# Altium PCB FC_MainBoard.PcbDoc (part 2 of 2)
Units mil, origin at the board's own origin, x right, y up, seen from the top; angles counter-clockwise.
Board outline 7630 x 3525 mil, 4 copper layers (Top Layer, Mid-Layer 1, Mid-Layer 2, Bottom Layer); 75 components, 79 nets, 708 pads, 334 vias.
Unrouted connection lines stored in the file: 1.
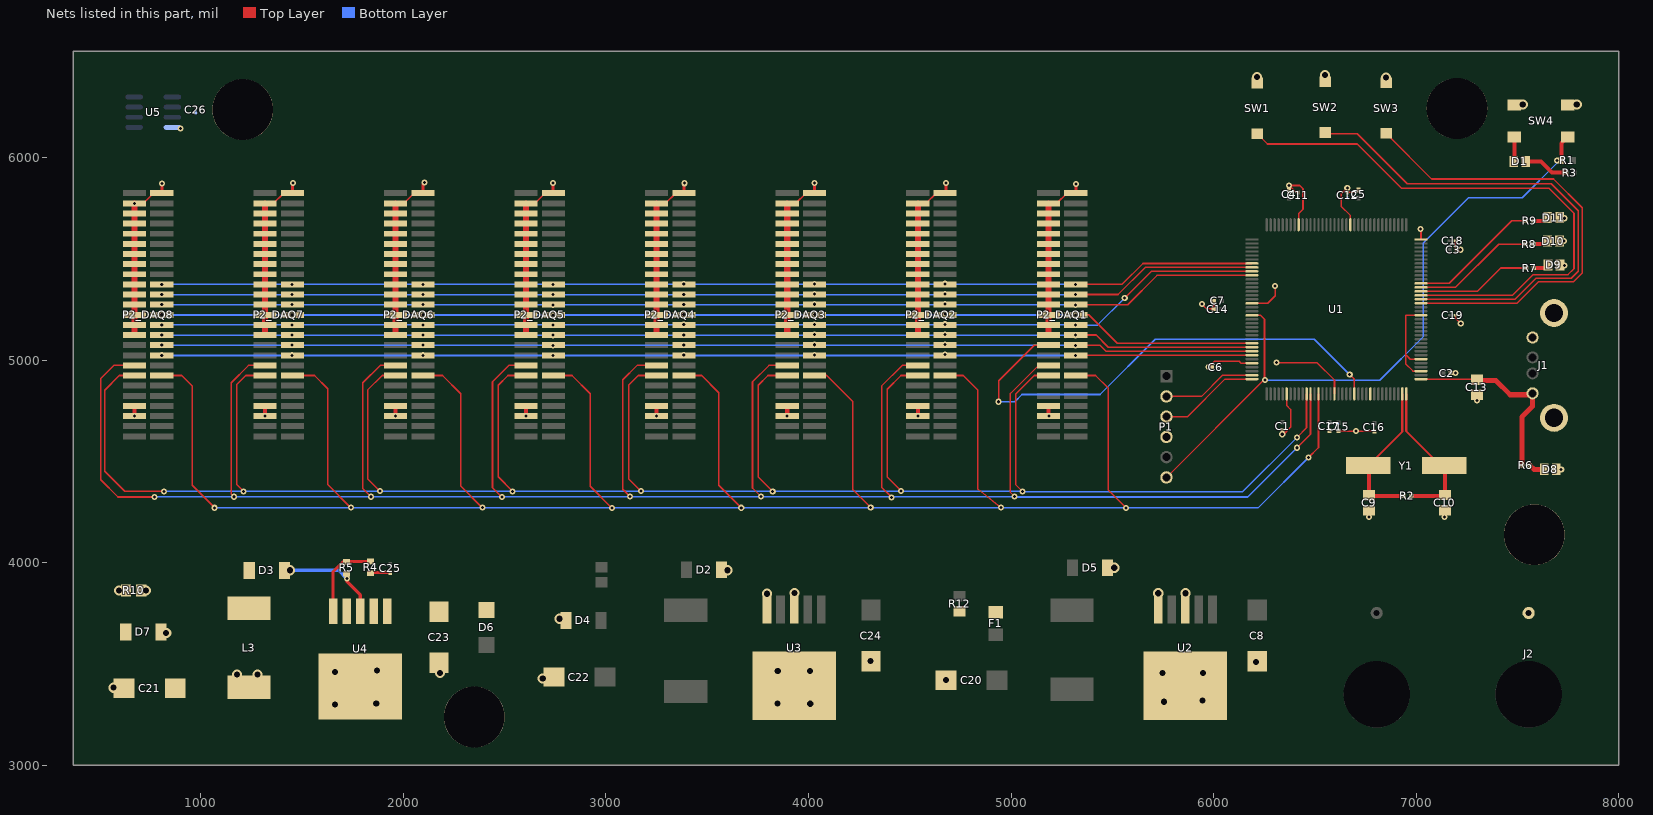
[diagram p4: the nets of this part, all layers, seen from the top]

## Via types
v1: diameter 30, hole 15, Top Layer to Bottom Layer, 289 vias
v2: diameter 50, hole 30, Top Layer to Bottom Layer, 45 vias

## Nets (pads, with @x,y where several pads share a name; then routed paths per layer and width w, separated by ;. In a path a pad name is that pad's centre, name@x,y a point inside that pad or via, vN(x,y) a via of type N, cw(c..) or ccw(c..) an arc to the next point about the centre after c; other vN are vias at no path point) (continued)
DATA8: P2_DAQ1.31 P2_DAQ2.31 P2_DAQ3.31 P2_DAQ4.31 P2_DAQ5.31 P2_DAQ6.31 P2_DAQ7.31 P2_DAQ8.31 U1.7 | length 5421.8
  Top Layer w8: P2_DAQ1.31@5319,5374 5548,5374 5651.38,5477.38 U1.7@6188.99,5477.38
  Bottom Layer w8: v1(807,5374) v1(1451,5374) v1(2097,5374) v1@5316,5374
  other v1: 2739,5373 5317,5373 3384,5375 4029,5376 4673,5377
DATA9: P2_DAQ1.29 P2_DAQ2.29 P2_DAQ3.29 P2_DAQ4.29 P2_DAQ5.29 P2_DAQ6.29 P2_DAQ7.29 P2_DAQ8.29 U1.8 | length 5435.8
  Top Layer w8: P2_DAQ1.29@5319,5324 5528,5324 5661.69,5457.69 U1.8@6188.99,5457.69
  Bottom Layer w8: v1(807,5324) 808,5323 v1(2739,5323) v1(5317,5323)
  other v1: 1451,5324 2097,5324 3384,5325 4029,5326 4673,5327
DATA10: P2_DAQ1.27 P2_DAQ2.27 P2_DAQ3.27 P2_DAQ4.27 P2_DAQ5.27 P2_DAQ6.27 P2_DAQ7.27 P2_DAQ8.27 U1.10 | length 5438.8
  Top Layer w8: P2_DAQ1.27@5319,5274 5576,5274 5720.32,5418.32 U1.10@6188.99,5418.32
  Bottom Layer w8: v1(807,5274) v1(1451,5274) v1(2097,5274) v1@5316,5274
  other v1: 2739,5273 5317,5273 3384,5275 4029,5276 4673,5277
DATA11: P2_DAQ1.25 P2_DAQ2.25 P2_DAQ3.25 P2_DAQ4.25 P2_DAQ5.25 P2_DAQ6.25 P2_DAQ7.25 P2_DAQ8.25 U1.27 | length 5437.1
  Top Layer w8: P2_DAQ1.25@5319,5224 5384,5224 5524.32,5083.68 U1.27@6188.99,5083.68
  Bottom Layer w8: v1@808,5223 v1(2739,5223) v1(5317,5223)
  other v1: 807,5224 1451,5224 2097,5224 3384,5225 4029,5226 4673,5227
DATA12: P2_DAQ1.23 P2_DAQ2.23 P2_DAQ3.23 P2_DAQ4.23 P2_DAQ5.23 P2_DAQ6.23 P2_DAQ7.23 P2_DAQ8.23 U1.9 | length 5490.8
  Top Layer w8: v1(5561,5307) 5692.01,5438.01 U1.9@6188.99,5438.01
  Bottom Layer w8: v1(807,5174) v1(1451,5174) v1(2097,5174) v1@5316,5174 ; v1(5317,5173) 5427,5173 v1(5561,5307)
  other v1: 2739,5173 3384,5175 4029,5176 4673,5177
DATA13: P2_DAQ1.21 P2_DAQ2.21 P2_DAQ3.21 P2_DAQ4.21 P2_DAQ5.21 P2_DAQ6.21 P2_DAQ7.21 P2_DAQ8.21 U1.28 | length 5403.8
  Top Layer w8: P2_DAQ1.21@5319,5124 5420,5124 5480.01,5063.99 U1.28@6188.99,5063.99
  Bottom Layer w8: v1@808,5123 v1(2739,5123) v1(5317,5123)
  other v1: 807,5124 1451,5124 2097,5124 3384,5125 4029,5126 4673,5127
DATA14: P2_DAQ1.19 P2_DAQ2.19 P2_DAQ3.19 P2_DAQ4.19 P2_DAQ5.19 P2_DAQ6.19 P2_DAQ7.19 P2_DAQ8.19 U1.29 | length 5391.3
  Top Layer w8: P2_DAQ1.19@5319,5074 5439,5074 5468.69,5044.31 U1.29@6188.99,5044.31
  Bottom Layer w8: v1(807,5074) v1(1451,5074) v1(2097,5074) v1@5316,5074
  other v1: 2739,5073 5317,5073 3384,5075 4029,5076 4673,5077
DATA15: P2_DAQ1.17 P2_DAQ2.17 P2_DAQ3.17 P2_DAQ4.17 P2_DAQ5.17 P2_DAQ6.17 P2_DAQ7.17 P2_DAQ8.17 U1.30 | length 5380.7
  Top Layer w8: P2_DAQ1.17@5319,5024 5319.62,5024.62 U1.30@6188.99,5024.62
  Bottom Layer w8: v1(807,5024) 808,5023 v1(2739,5023) v1(5317,5023)
  other v1: 1451,5024 2097,5024 3384,5025 4029,5026 4673,5027
FRSTDATA_DAQ1: P2_DAQ1.14 P2_DAQ2.14 P2_DAQ3.14 P2_DAQ4.14 P2_DAQ5.14 P2_DAQ6.14 P2_DAQ7.14 P2_DAQ8.14 U1.47 | length 11775
  Top Layer w8: P2_DAQ8.14@672,4924 597.48,4924 525.17,4851.69 525.17,4452.16 624.88,4352.44 v1(818.66,4352.44) ; v1(1211.32,4351.99) 1177.99,4385.32 1177.99,4880.27 1221.72,4924 P2_DAQ7.14@1316.57,4924 ; v1(1884.4,4353.18) 1823.19,4414.39 1823.19,4852.33 1894.86,4924 P2_DAQ6.14@1961.14,4924 ; v1(2538.96,4352.39) 2467.57,4423.77 2467.57,4875.65 2515.92,4924 P2_DAQ5.14@2605.71,4924 ; v1(3172.22,4353.97) 3112.84,4413.35 3112.84,4877.52 3159.32,4924 P2_DAQ4.14@3250.29,4924 ; v1(3823.22,4351.99) 3752.51,4422.71 3752.51,4876.59 3799.92,4924 P2_DAQ3.14@3894.86,4924 ; v1(4457.52,4353.57) 4388.47,4422.62 4388.47,4856.14 4456.33,4924 P2_DAQ2.14@4539.43,4924 ; v1(5056.69,4351.42) 5022.25,4385.86 5022.25,4832.08 5114.17,4924 P2_DAQ1.14@5184,4924 ; v1(6410.99,4617.99) 6458.68,4665.68 U1.47@6458.68,4833.68
  Bottom Layer w8: v1(818.66,4352.44) 5055.66,4352.44 v1(5056.69,4351.42) ; v1@5059.68,4349.92 6142.92,4349.92 v1(6410.99,4617.99)
GND: C1.1 C2.1 C3.1 C4.1 C5.1 C6.1 C7.1 C8.2 C9.1 C10.1 C11.2 C12.2 C13.1 C14.1 C15.1 C16.1 C17.1 C18.2 C19.2 C20.2 C21.1 C22.2 C24.2 C26.2 D2.1 D4.1 D5.1 D7.2 D8.2 D9.2 D10.2 D11.2 J1.4 J1.5 J1.6 J2.1 L3.2 P1.4 P2_DAQ1.22 P2_DAQ1.24 P2_DAQ1.26 P2_DAQ1.28 P2_DAQ1.30 P2_DAQ1.32 P2_DAQ1.34 P2_DAQ1.36 P2_DAQ1.38 P2_DAQ1.40 P2_DAQ1.42 P2_DAQ1.44 P2_DAQ1.46 P2_DAQ1.48 P2_DAQ1.49 P2_DAQ2.22 P2_DAQ2.24 P2_DAQ2.26 P2_DAQ2.28 P2_DAQ2.30 P2_DAQ2.32 P2_DAQ2.34 P2_DAQ2.36 P2_DAQ2.38 P2_DAQ2.40 P2_DAQ2.42 P2_DAQ2.44 P2_DAQ2.46 P2_DAQ2.48 P2_DAQ2.49 P2_DAQ3.22 P2_DAQ3.24 P2_DAQ3.26 P2_DAQ3.28 P2_DAQ3.30 P2_DAQ3.32 P2_DAQ3.34 P2_DAQ3.36 P2_DAQ3.38 P2_DAQ3.40 P2_DAQ3.42 P2_DAQ3.44 P2_DAQ3.46 P2_DAQ3.48 P2_DAQ3.49 P2_DAQ4.22 P2_DAQ4.24 P2_DAQ4.26 P2_DAQ4.28 P2_DAQ4.30 P2_DAQ4.32 P2_DAQ4.34 P2_DAQ4.36 P2_DAQ4.38 P2_DAQ4.40 P2_DAQ4.42 P2_DAQ4.44 P2_DAQ4.46 P2_DAQ4.48 P2_DAQ4.49 P2_DAQ5.22 P2_DAQ5.24 P2_DAQ5.26 P2_DAQ5.28 P2_DAQ5.30 P2_DAQ5.32 P2_DAQ5.34 P2_DAQ5.36 P2_DAQ5.38 P2_DAQ5.40 P2_DAQ5.42 P2_DAQ5.44 P2_DAQ5.46 P2_DAQ5.48 P2_DAQ5.49 P2_DAQ6.22 P2_DAQ6.24 P2_DAQ6.26 P2_DAQ6.28 P2_DAQ6.30 P2_DAQ6.32 P2_DAQ6.34 P2_DAQ6.36 P2_DAQ6.38 P2_DAQ6.40 P2_DAQ6.42 P2_DAQ6.44 P2_DAQ6.46 P2_DAQ6.48 P2_DAQ6.49 P2_DAQ7.22 P2_DAQ7.24 P2_DAQ7.26 P2_DAQ7.28 P2_DAQ7.30 P2_DAQ7.32 P2_DAQ7.34 P2_DAQ7.36 P2_DAQ7.38 P2_DAQ7.40 P2_DAQ7.42 P2_DAQ7.44 P2_DAQ7.46 P2_DAQ7.48 P2_DAQ7.49 P2_DAQ8.22 P2_DAQ8.24 P2_DAQ8.26 P2_DAQ8.28 P2_DAQ8.30 P2_DAQ8.32 P2_DAQ8.34 P2_DAQ8.36 P2_DAQ8.38 P2_DAQ8.40 P2_DAQ8.42 P2_DAQ8.44 P2_DAQ8.46 P2_DAQ8.48 P2_DAQ8.49 pad.0 SW1.2 SW2.2 SW3.2 SW4.1 SW4.2 U1.17 U1.32 U1.42 U1.54 U1.63 U1.75 U1.78 U1.89 U1.108 U1.123 U1.136 U2.3 U2.5 U2.6 U3.3 U3.5 U3.6 U4.6 U5.4 | length 9128.4
  Top Layer w8: P2_DAQ8.48@716.47,5774 766.47,5824 P2_DAQ8.49@807,5824 ; P2_DAQ7.48@1316.57,5774 1358.94,5774 P2_DAQ7.49@1408.94,5824 ; P2_DAQ6.48@1961.14,5774 2002.47,5774 P2_DAQ6.49@2052.47,5824 ; P2_DAQ5.48@2605.71,5774 2649.24,5774 P2_DAQ5.49@2700.7,5825.46 ; P2_DAQ4.48@3250.29,5774 3294.22,5774 3344.22,5824 P2_DAQ4.49@3385.29,5824 ; P2_DAQ3.48@3894.86,5774 3937.03,5774 P2_DAQ3.49@3987.03,5824 ; P2_DAQ2.48@4539.43,5774 4579.85,5774 P2_DAQ2.49@4629.85,5824 ; P2_DAQ1.48@5184,5774 5225.88,5774 5275.88,5824 P2_DAQ1.49@5319,5824 ; v1(5941.72,5276.39) 5965.1,5253 5999.63,5253 C7.1@5999.63,5292 ; v1(5975.63,4965.65) 6004.02,4994.05 6126.49,4994.05 6135.29,4985.25 U1.32@6188.99,4985.25 ; U1.17@6188.99,5280.53 6267,5280.53 6303.91,5317.44 v1(6303.91,5366.17) ; v1(6309.87,4987.36) 6510.66,4987.36 6596.47,4901.55 U1.54@6596.47,4833.68 ; v1(6338.68,4634.07) 6345.49,4634.07 6379.79,4668.36 6379.79,4756.79 6360.25,4776.32 U1.42@6360.25,4833.68 ; C11.2@6417.14,5827.78 6407.19,5827.78 v1(6372.67,5862.3) 6424.99,5862.3 6440.99,5846.3 6440.99,5744.97 6419.31,5723.29 U1.136@6419.31,5668.32 ; C15.1@6619,4649.32 C16.1@6794,4649.32 ; v1(6659.75,5850.12) 6630.4,5820.76 6630.4,5758.86 6675.21,5714.05 U1.123@6675.21,5668.32 ; C12.2@6661.31,5828.78 6704.41,5828.78 C5.1@6715.31,5839.69 ; U1.89@7023.5,5221.34 6947.55,5221.34 6947.55,5028.43 ; U1.75@7023.64,4945.88 6983.8,4945.88 6947.55,4982.12 6947.55,5028.43 ; U1.78@7023.64,5004.94 6971.04,5004.94 6947.55,5028.43 ; U1.108@7023.64,5595.49 v1@7023.64,5646.05 ; C18.2@7193.09,5590 7193.09,5554.91 C3.1@7202,5546 ; C19.2@7195.09,5221 7195.09,5205.78 v1(7219.97,5180.9)
  Top Layer w15: P2_DAQ8.49@807,5824 807.71,5824.71 v1(807.71,5872.66) ; P2_DAQ7.49@1451.57,5824 v1@1451.57,5872.01 ; P2_DAQ6.49@2096.14,5824 2096.14,5867.72 v1(2104.65,5876.22) ; P2_DAQ5.49@2739.25,5825.46 v1(2739.25,5873.85) ; P2_DAQ4.49@3385.29,5824 3385.29,5871.01 v1(3387.72,5873.45) ; v1(4029.06,5874.64) 4029.86,5873.84 P2_DAQ3.49@4029.86,5824 ; P2_DAQ2.49@4674.43,5824 4679.11,5828.68 v1(4679.11,5874.24) ; P2_DAQ1.49@5319,5824 5320.05,5825.05 v1(5320.05,5868.7)
  Top Layer w30: P2_DAQ8.22@672,5124 P2_DAQ8.24@672,5174 P2_DAQ8.26@672,5224 P2_DAQ8.28@672,5274 P2_DAQ8.30@672,5324 P2_DAQ8.32@672,5374 P2_DAQ8.34@672,5424 P2_DAQ8.36@672,5474 P2_DAQ8.38@672,5524 P2_DAQ8.40@672,5574 P2_DAQ8.42@672,5624 P2_DAQ8.44@672,5674 P2_DAQ8.46@672,5724 v1(672,5774) ; P2_DAQ7.22@1316.57,5124 P2_DAQ7.24@1316.57,5174 P2_DAQ7.26@1316.57,5224 P2_DAQ7.28@1316.57,5274 P2_DAQ7.30@1316.57,5324 P2_DAQ7.32@1316.57,5374 P2_DAQ7.34@1316.57,5424 P2_DAQ7.36@1316.57,5474 P2_DAQ7.38@1316.57,5524 P2_DAQ7.40@1316.57,5574 P2_DAQ7.42@1316.57,5624 P2_DAQ7.44@1316.57,5674 P2_DAQ7.46@1316.57,5724 P2_DAQ7.48@1316.57,5774 ; P2_DAQ6.22@1961.14,5124 P2_DAQ6.24@1961.14,5174 P2_DAQ6.26@1961.14,5224 P2_DAQ6.28@1961.14,5274 P2_DAQ6.30@1961.14,5324 P2_DAQ6.32@1961.14,5374 P2_DAQ6.34@1961.14,5424 P2_DAQ6.36@1961.14,5474 P2_DAQ6.38@1961.14,5524 P2_DAQ6.40@1961.14,5574 P2_DAQ6.42@1961.14,5624 P2_DAQ6.44@1961.14,5674 P2_DAQ6.46@1961.14,5724 P2_DAQ6.48@1961.14,5774 ; P2_DAQ5.22@2605.71,5124 P2_DAQ5.24@2605.71,5174 P2_DAQ5.26@2605.71,5224 P2_DAQ5.28@2605.71,5274 P2_DAQ5.30@2605.71,5324 P2_DAQ5.32@2605.71,5374 P2_DAQ5.34@2605.71,5424 P2_DAQ5.36@2605.71,5474 P2_DAQ5.38@2605.71,5524 P2_DAQ5.40@2605.71,5574 P2_DAQ5.42@2605.71,5624 P2_DAQ5.44@2605.71,5674 P2_DAQ5.46@2605.71,5724 P2_DAQ5.48@2605.71,5774 ; P2_DAQ4.22@3250.29,5124 P2_DAQ4.24@3250.29,5174 P2_DAQ4.26@3250.29,5224 P2_DAQ4.28@3250.29,5274 P2_DAQ4.30@3250.29,5324 P2_DAQ4.32@3250.29,5374 P2_DAQ4.34@3250.29,5424 P2_DAQ4.36@3250.29,5474 P2_DAQ4.38@3250.29,5524 P2_DAQ4.40@3250.29,5574 P2_DAQ4.42@3250.29,5624 P2_DAQ4.44@3250.29,5674 P2_DAQ4.46@3250.29,5724 P2_DAQ4.48@3250.29,5774 ; P2_DAQ3.22@3894.86,5124 P2_DAQ3.24@3894.86,5174 P2_DAQ3.26@3894.86,5224 P2_DAQ3.28@3894.86,5274 P2_DAQ3.30@3894.86,5324 P2_DAQ3.32@3894.86,5374 P2_DAQ3.34@3894.86,5424 P2_DAQ3.36@3894.86,5474 P2_DAQ3.38@3894.86,5524 P2_DAQ3.40@3894.86,5574 P2_DAQ3.42@3894.86,5624 P2_DAQ3.44@3894.86,5674 P2_DAQ3.46@3894.86,5724 P2_DAQ3.48@3894.86,5774 ; P2_DAQ2.22@4539.43,5124 P2_DAQ2.24@4539.43,5174 P2_DAQ2.26@4539.43,5224 P2_DAQ2.28@4539.43,5274 P2_DAQ2.30@4539.43,5324 P2_DAQ2.32@4539.43,5374 P2_DAQ2.34@4539.43,5424 P2_DAQ2.36@4539.43,5474 P2_DAQ2.38@4539.43,5524 P2_DAQ2.40@4539.43,5574 P2_DAQ2.42@4539.43,5624 P2_DAQ2.44@4539.43,5674 P2_DAQ2.46@4539.43,5724 P2_DAQ2.48@4539.43,5774 ; P2_DAQ1.22@5184,5124 P2_DAQ1.24@5184,5174 P2_DAQ1.26@5184,5224 P2_DAQ1.28@5184,5274 P2_DAQ1.30@5184,5324 P2_DAQ1.32@5184,5374 P2_DAQ1.34@5184,5424 P2_DAQ1.36@5184,5474 P2_DAQ1.38@5184,5524 P2_DAQ1.40@5184,5574 P2_DAQ1.42@5184,5624 P2_DAQ1.44@5184,5674 P2_DAQ1.46@5184,5724 P2_DAQ1.48@5184,5774
  other v1: 6766.13,4226.14 7140.09,4226.14 7715.93,4461.11 6703.39,4649.76 7300.03,4801.4 7194.19,4937.1 7731.29,5467.41 7218.84,5545.06 7729.19,5588.82 7021.99,5647.69 7732.71,5700.41 1454.2,5874.64 899.53,6143.09
  other v2: 1661.83,3299.63 4008.41,3303.64 1866.05,3305.63 3846.23,3305.63 5754.34,3313.65 5944.55,3319.66 4679.02,3420 2687.9,3427.78 1179.3,3447.8 1279.41,3447.8 5748.33,3455.8 5946.55,3455.8 1661.83,3459.81 3848.24,3465.82 4006.41,3465.82 1870.06,3467.82 6209.36,3510.64 4305.76,3513.74 828.91,3652.02 2770.21,3723.18 3795.43,3846.64 5726.5,3849.27 5860.48,3849.28 3929.87,3850.3 3599.71,3962.8 5509.36,3975.01 7525.95,6261.26 7792.67,6261.26 6850.46,6396.05 6213.8,6396.89 6550.65,6408.55
LED0: R7.2 U1.95 | length 565.4
  Top Layer w8: U1.95@7023.64,5339.58 7302.78,5339.58 7417.79,5454.6 R7.2@7541.44,5454.6
LED1: R8.2 U1.96 | length 604.1
  Top Layer w8: U1.96@7023.64,5359.27 7194.02,5359.27 7407.39,5572.64 R8.2@7539.34,5572.64
LED2: R9.2 U1.97 | length 645.2
  Top Layer w8: U1.97@7023.64,5378.95 7163.33,5378.95 7472.1,5687.71 R9.2@7540.9,5687.71
M\C\L\R\: P1.6 R1.1 SW4.4 U1.20 | length 3349.8
  Top Layer w8: P1.6@5767,4421 6251,4905 6251,5202 6231.53,5221.47 U1.20@6188.99,5221.47
  Top Layer w20: R1.1@7716.79,5986 7716.79,6070.84 SW4.4@7748.2,6102.26
  Bottom Layer w8: v1(6253.48,4900.95) 6820.04,4900.95 7035.6,5116.51 7035.6,5579.33 7257.9,5801.63 7523.5,5801.63 7694.85,5972.98 v1(7694.85,5985.44)
N5T: R4.2 R5.1 U4.5 | length 400.5
  Top Layer w15: U4.5@1653.14,3761.22 1653.14,3956.94 1699.68,4003.48 R5.1@1719.61,4003.48 1722.18,4006.05 R4.2@1837.59,4006.05
N5V: P2_DAQ1.6 P2_DAQ1.8 P2_DAQ2.6 P2_DAQ2.8 P2_DAQ3.6 P2_DAQ3.8 P2_DAQ4.6 P2_DAQ4.8 P2_DAQ5.6 P2_DAQ5.8 P2_DAQ6.6 P2_DAQ6.8 P2_DAQ7.6 P2_DAQ7.8 P2_DAQ8.6 P2_DAQ8.8 R10.2 | length 400
  Top Layer w20: v1(672,4724) P2_DAQ8.8@672,4774 ; v1(1316.57,4724) P2_DAQ7.8@1316.57,4774 ; v1(1961.14,4724) P2_DAQ6.8@1961.14,4774 ; v1(2605.71,4724) P2_DAQ5.8@2605.71,4774 ; v1(3250.29,4724) P2_DAQ4.8@3250.29,4774 ; v1(3894.86,4724) P2_DAQ3.8@3894.86,4774 ; v1(4539.44,4724.01) P2_DAQ2.8@4539.43,4774 ; P2_DAQ1.6@5184,4724 P2_DAQ1.8@5184,4774
  other v1: 5187.88,4723.43
  other v2: 728.8,3862.45
N5VO: D3.2 L3.1 U4.2 U4.4
N5VR: C21.2 C23.2 D3.1 D7.1 R5.2 R10.1 U4.3 | length 508.6
  Top Layer w15: R5.2@1719.61,3944.43 1719.61,3908.54 1787,3841.15 U4.3@1787,3761.22
  Bottom Layer w15: v2(1440.45,3962.72) 1679.32,3962.72 v1(1720.77,3921.26)
  other v2: 568.36,3382.85 2181.12,3456.46 595.7,3863.29
NetC23_1: C23.1 D6.2 U4.1
NetC25_1: C25.1 R4.1 | length 92.7
  Top Layer w15: R4.1@1842.3,3951.71 C25.1@1935.04,3951.71
NetD1_1: D1.1 R3.1 | length 221.4
  Top Layer w20: D1.1@7540.84,5981 7615.4,5981 7670.31,5926.09 R3.1@7739.52,5926.09
NetD1_2: D1.2 SW4.3 | length 122.4
  Top Layer w20: D1.2@7481.79,5981 7484.42,5983.64 SW4.3@7484.42,6102.26
NetD8_1: D8.1 R6.1 | length 79.1
  Top Layer w25: R6.1@7561,4481 7581,4461 D8.1@7631.79,4461
NetD9_1: D9.1 R7.1 | length 75.9
  Top Layer w20: R7.1@7580.82,5454.6 7634.98,5454.6 D9.1@7650.32,5469.94
NetD10_1: D10.1 R8.1 | length 79.1
  Top Layer w20: R8.1@7578.71,5572.64 7629.49,5572.64 D10.1@7649.49,5592.64
NetD11_1: D11.1 R9.1 | length 79.1
  Top Layer w20: R9.1@7580.27,5687.71 7631.05,5687.71 D11.1@7651.05,5707.71
NetF1_2: F1.2 R12.1
OSC1: C9.2 R2.2 U1.71 Y1.1 | length 742.2
  Top Layer w10: Y1.1@6763.95,4479.43 6931.12,4646.59 U1.71@6931.12,4833.68
  Top Layer w20: Y1.1@6763.95,4479.43 6767.31,4476.06 C9.2@6767.31,4332.4 6769.72,4330 R2.2@6936.63,4330
OSC2: C10.2 R2.1 U1.72 Y1.2 | length 755.9
  Top Layer w10: U1.72@6950.8,4833.68 6950.8,4649.51 7120.89,4479.43 Y1.2@7138.95,4479.43
  Top Layer w20: R2.1@6976,4330 7136.91,4330 C10.2@7141.31,4334.4 7141.31,4477.06 Y1.2@7138.95,4479.43
PGC: P1.2 U1.35 | length 465.6
  Top Layer w8: P1.2@5767,4821 5940,4821 6045.2,4926.2 U1.35@6188.99,4926.2
PGD: P1.3 U1.36 | length 498.8
  Top Layer w8: P1.3@5767,4721 5871,4721 6056.51,4906.51 U1.36@6188.99,4906.51
R\D\_DAQ1: P2_DAQ1.13 P2_DAQ2.13 P2_DAQ3.13 P2_DAQ4.13 P2_DAQ5.13 P2_DAQ6.13 P2_DAQ7.13 P2_DAQ8.13 U1.50 | length 12406.8
  Top Layer w8: P2_DAQ8.13@807,4924 905.64,4924 957,4872.64 957,4382.34 v1(1068.18,4271.16) ; P2_DAQ7.13@1451.57,4924 1561.08,4924 1626.15,4858.93 1626.15,4385.89 v1(1740.48,4271.56) ; P2_DAQ6.13@2096.14,4924 2193.32,4924 2282.56,4834.75 2282.56,4378.9 v1(2389.91,4271.56) ; P2_DAQ5.13@2740.71,4924 2832.06,4924 2922.23,4833.83 2922.23,4376.84 v1(3029.09,4269.98) ; P2_DAQ4.13@3385.29,4924 3472.67,4924 3557.26,4839.4 3557.26,4381.77 v1(3667.87,4271.16) ; P2_DAQ3.13@4029.86,4924 4090.01,4924 4219.24,4794.77 4219.24,4360.54 v1(4307.04,4272.74) ; P2_DAQ2.13@4674.43,4924 4763.25,4924 4836.2,4851.05 4836.2,4363.77 v1(4950.4,4272.06) ; P2_DAQ1.13@5319,4924 5416.96,4924 5480.45,4860.51 5480.45,4357.39 v1(5567.29,4270.55) ; v1(6467.76,4518.76) 6517.73,4568.74 U1.50@6517.73,4833.68
  Bottom Layer w8: v1@1073.65,4272.06 v1(4950.4,4272.06) 6221.05,4272.05 v1(6467.76,4518.76)
R\E\S\E\T\_DAQ1: P2_DAQ1.16 P2_DAQ2.16 P2_DAQ3.16 P2_DAQ4.16 P2_DAQ5.16 P2_DAQ6.16 P2_DAQ7.16 P2_DAQ8.16 U1.48 | length 12491.7
  Top Layer w8: P2_DAQ8.16@672,4974 570.64,4974 506.13,4909.49 506.13,4409.27 591.18,4324.22 v1(771.61,4324.22) ; v1(1163.21,4325.57) 1149.42,4339.37 1149.42,4887.9 1235.52,4974 P2_DAQ7.16@1316.57,4974 ; v1(1839.85,4325.57) 1799.09,4366.34 1799.09,4887.75 1885.34,4974 P2_DAQ6.16@1961.14,4974 ; v1(2485.73,4324) 2439.68,4370.04 2439.68,4893.32 2520.36,4974 P2_DAQ5.16@2605.71,4974 ; v1(3119.38,4325.97) 3082.16,4363.2 3082.16,4902.63 3153.53,4974 P2_DAQ4.16@3250.29,4974 ; v1(3765.66,4326.36) 3723.69,4368.33 3723.69,4893.33 3804.36,4974 P2_DAQ3.16@3894.86,4974 ; v1(4410.49,4322.63) 4360.58,4372.55 4360.58,4871.94 4462.63,4974 P2_DAQ2.16@4539.43,4974 ; v1(5017.76,4325.96) 4996.79,4346.92 4996.79,4835.07 5135.72,4974 P2_DAQ1.16@5184,4974 ; v1(6411.95,4567.42) 6478.36,4633.84 U1.48@6478.36,4833.68
  Bottom Layer w8: v1@771.61,4325.96 v1(5017.76,4325.96) ; v1@5022.24,4324.45 6168.98,4324.45 v1(6411.95,4567.42)
S\T\B\Y\_DAQ1: P2_DAQ1.20 U1.59 | length 2469
  Top Layer w8: v1(4938.39,4794.64) 4938.39,4897.75 5114.64,5074 P2_DAQ1.20@5184,5074 ; v1(6671.76,4928.57) 6694.9,4905.43 U1.59@6694.9,4833.68
  Bottom Layer w8: v1@4929.41,4794.64 5017.93,4794.64 5053.44,4830.15 5438.93,4830.15 5712.3,5103.52 6496.8,5103.52 v1(6671.76,4928.57)
S\T\B\Y\_DAQ2: P2_DAQ2.20 U1.60 | length 3143.9
  Top Layer w8: v1(4282.54,4824.59) 4282.54,4919.81 4436.72,5074 P2_DAQ2.20@4539.43,5074 ; v1(6671.09,4973.03) 6713.29,4930.83 6713.29,4834.97 U1.60@6714.58,4833.68
  Bottom Layer w8: v1(4282.54,4824.59) 4355.62,4824.59 4378.83,4847.8 5431.46,4847.8 5702.19,5118.52 6525.59,5118.52 v1(6671.09,4973.03)
S\T\B\Y\_DAQ2: 
S\T\B\Y\_DAQ3: P2_DAQ3.20 U1.61 | length 3819.6
  Top Layer w8: v1(3652.14,4832.08) 3652.14,4953.16 3772.97,5074 P2_DAQ3.20@3894.86,5074 ; v1(6722.67,4973.37) 6734.27,4961.77 U1.61@6734.27,4833.68
  Bottom Layer w8: v1(3652.14,4832.08) 3701.4,4832.08 3732.73,4863.41 5423.32,4863.41 5692.84,5132.93 6563.11,5132.93 v1(6722.67,4973.37)
S\T\B\Y\_DAQ3: 
S\T\B\Y\_DAQ4: P2_DAQ4.20 U1.62 | length 4462.2
  Top Layer w8: v1(3003.76,4848.55) 3003.76,4894.56 3183.2,5074 P2_DAQ4.20@3250.29,5074 ; v1(6723.01,5018.5) 6753.95,4987.56 U1.62@6753.95,4833.68
  Bottom Layer w8: v1(3003.76,4848.55) 3073.13,4848.55 3103.59,4879.01 5414.49,4879.01 5684.41,5148.93 6592.58,5148.93 v1(6723.01,5018.5)
S\T\B\Y\_DAQ4: 
S\T\B\Y\_DAQ5: P2_DAQ5.20 U1.65 | length 5191.4
  Top Layer w8: v1(2356.89,4863.52) 2356.89,4946.05 2484.84,5074 P2_DAQ5.20@2605.71,5074 ; v1(6775.27,5020.2) 6813.01,4982.46 U1.65@6813.01,4833.68
  Bottom Layer w8: v1@2353.9,4866.52 2421.88,4866.52 2449.48,4894.12 5408.22,4894.12 5679.03,5164.93 6630.53,5164.93 v1(6775.27,5020.2)
S\T\B\Y\_DAQ5: 
S\T\B\Y\_DAQ6: P2_DAQ6.20 U1.66 | length 5857.8
  Top Layer w8: v1(1710.02,4887.48) 1710.02,4950.37 1833.65,5074 P2_DAQ6.20@1961.14,5074 ; v1(6777.3,5066.35) 6832.69,5010.96 U1.66@6832.69,4833.68
  Bottom Layer w8: v1(1710.02,4887.48) 1831.66,4887.48 1854.15,4909.98 5398.06,4909.98 5669.82,5181.74 6661.91,5181.74 v1(6777.3,5066.35)
S\T\B\Y\_DAQ6: 
S\T\B\Y\_DAQ7: P2_DAQ7.20 U1.67 | length 6509.2
  Top Layer w8: v1(1067.64,4915.93) 1067.64,4971.34 1170.3,5074 P2_DAQ7.20@1316.57,5074 ; v1(6827.85,5066.34) 6852.38,5041.81 U1.67@6852.38,4833.68
  Bottom Layer w8: v1@1075.13,4928.01 5390.98,4928.01 5661.5,5198.54 6695.65,5198.54 v1(6827.85,5066.34)
S\T\B\Y\_DAQ7: 
S\T\B\Y\_DAQ8: P2_DAQ8.20 U1.68 | length 7074
  Top Layer w8: v1(480.66,4986.31) 480.66,5017.75 536.91,5074 P2_DAQ8.20@672,5074 ; v1(6831.94,5115.89) 6872.06,5075.77 U1.68@6872.06,4833.68
  Bottom Layer w8: v1(480.66,4986.31) 480.66,4971.34 507.08,4944.92 5385.6,4944.92 5654.42,5213.73 6734.09,5213.73 v1(6831.94,5115.89)
S\T\B\Y\_DAQ8: 
SW1: SW1.1 U1.94 | length 2809.8
  Top Layer w8: SW1.1@6215.31,6117.59 6265.77,6067.12 6709.37,6067.12 6927.2,5849.3 7655.39,5849.3 7778.88,5725.81 7778.88,5451.75 7749.52,5422.4 7578.26,5422.4 7475.76,5319.9 U1.94@7023.64,5319.9
SW2: SW2.1 U1.93 | length 2535.9
  Top Layer w8: SW2.1@6553.77,6118.1 6708.36,6118.1 6955.88,5870.58 7666.27,5870.58 7799.69,5737.16 7799.69,5438.21 7765.63,5404.15 7591.55,5404.15 7487.61,5300.21 U1.93@7023.64,5300.21
SW3: SW3.1 U1.92 | length 2292.2
  Top Layer w8: SW3.1@6856.7,6113.43 7075.89,5894.23 7677.64,5894.23 7819.56,5752.32 7819.56,5430.64 7775.09,5386.18 7602.9,5386.18 7497.25,5280.53 U1.92@7023.64,5280.53
VBUS: C13.2 J1.1 R6.2 U1.73 | length 963.4
  Top Layer w8: U1.73@7023.64,4906.51 C13.2@7305.46,4906.51
  Top Layer w25: C13.2@7299.13,4900 7393.31,4900 7464.11,4829.2 J1.1@7574.31,4829.2 ; R6.2@7521.63,4481 7521.63,4719.31 7574.31,4772 J1.1@7574.31,4829.2 ; J1.1@7574.31,4836.2 J1.1@7574.31,4829.2
pads on no net: J2.0 J3.0 P1.1 U1.1 U1.2 U1.3 U1.4 U1.5 U1.6 U1.11 U1.12 U1.13 U1.14 U1.15 U1.16 U1.19 U1.21 U1.22 U1.23 U1.24 U1.25 U1.26 U1.31 U1.34 U1.37 U1.38 U1.39 U1.40 U1.43 U1.44 U1.45 U1.46 U1.51 U1.52 U1.53 U1.56 U1.57 U1.58 U1.69 U1.70 U1.79 U1.80 U1.81 U1.82 U1.83 U1.84 U1.85 U1.86 U1.87 U1.90 U1.91 U1.106 U1.109 U1.110 U1.111 U1.112 U1.113 U1.118 U1.119 U1.120 U1.121 U1.124 U1.125 U1.126 U1.127 U1.128 U1.129 U1.130 U1.135 U1.138 U1.139 U1.140 U1.141 U1.142 U1.143 U1.144 U5.1 U5.3 U5.5 U5.7 U5.8

## Polygon pours and split planes (outlines as drawn)
3V3 on Mid-Layer 2 "Bottom Layer-N5VR" (solid, pour order 20): 6067.62,3221.22 6072.16,3225.76 6072.16,3850.47 6072.16,3875.46 5976.75,3970.87 5940.4,4007.22 5876.8,4007.22 5638.27,4007.22 5569.26,3918.36 4739,3918.36 4468.37,3766.42 4463.82,3761.88 4463.82,3548.34 4463.82,3380.24 4595.58,3248.48 4620.57,3223.49 6067.62,3223.49
N5VR on Mid-Layer 2 "Bottom Layer-N5VR" (solid, pour order 16): 2291.84,3429.17 2291.84,3674.8 1964.9,4001.74 1947.97,4018.67 1283.61,4018.67 686.94,4018.67 558.58,3890.31 516.26,3847.99 516.26,3396.61 516.26,3320.44 578.33,3258.38 613.59,3223.12 2085.81,3223.13
3V3 on Mid-Layer 2 "Bottom Layer-N5VR" (solid, pour order 22): 5939.35,4006.97 5939.35,4224.42 6263.45,4548.52 6435.78,4720.85 6996.48,4720.85 7052.55,4720.85 7226.23,4894.53 7274.1,4942.39 7274.1,5620.71 7274.1,5645.32 7079.9,5839.52 7059.4,5860.02 6212.85,5860.02 6180.03,5860.02 5999.52,5679.51 5965.32,5645.31 5965.32,5236.41 5965.32,4905.46 5925.5,4865.63 645.35,4865.64 568.95,4789.23 568.95,4733.8 568.95,4714.16 587.17,4695.94 590.2,4698.96 5526.34,4698.96 5542.75,4698.96 5560.53,4681.18 5641.22,4600.5 5641.22,3998.77
5V on Mid-Layer 1 "Bottom Layer-N5VR" (solid, remove dead copper, pour order 24): 3650.14,3295.81 3650.14,3473.61 3527.07,3596.69 3508.42,3615.33 3269.71,3615.33 3247.34,3615.33 3195.12,3667.55 3159.06,3703.61 3159.06,3822.95 3159.06,3990.78 2950.19,4199.65 2906.67,4243.17 671.35,4243.17 662.64,4243.17 598,4307.82 539.57,4366.25 539.56,4704.41 579.99,4744.83 746.59,4744.83 5359.2,4744.83 5394.41,4816.3 5399.37,4821.27 5399.37,4883.45 5399.37,4893.39 5368.3,4924.46 5367.06,4925.71 5314.84,4925.71 555.73,4925.71 422.7,4792.68 423.94,4791.45 423.94,4659.66 423.94,4290.42 539.57,4174.79 596.75,4117.6 788.21,4117.6 2217.36,4117.6 2348.24,3926.27 2348.24,3492.21 2612.37,3241.12 3544.47,3241.12 3599.17,3241.12 3648.9,3290.85
24V on Mid-Layer 1 "Bottom Layer-N5VR" (solid, remove dead copper, pour order 52): 7201.42,3070.92 7208.85,3078.35 7208.85,3859.09 6379.79,3859.09 6279.4,3959.48 6004.28,4234.6 5755.19,4234.6 5706.86,4234.6 5532.12,4409.34 5420.59,4520.87 5420.59,4602.66 5420.59,4650.99 5387.12,4684.46 5368.53,4703.05 5290.46,4703.05 617.16,4703.05 613.43,4699.32 594.85,4680.74 594.85,4673.3 594.85,4628.69 591.13,4624.97 591.13,4584.07 609.71,4565.48 646.88,4528.31 1643.28,4528.31 5126.88,4528.31 5130.6,4524.59 5160.34,4494.85 5160.34,4491.13 5584.17,4067.3 5844.42,4067.3 5944.8,3966.92 6089.79,3821.92 6089.79,3364.63 6089.79,3238.22 6060.05,3208.48 6037.74,3186.17 5569.3,3186.17 4624.97,3186.17 4472.54,3338.61 4435.36,3375.78 4435.36,3610.01 4435.36,3821.92 4383.31,3873.97 4353.57,3903.71 4268.06,3903.71 4234.6,3903.71 4204.86,3873.97 4171.4,3840.51 4171.4,3606.29 4171.4,3301.43 4245.75,3227.07 4409.35,3063.48 4517.15,3063.48 7201.41,3063.48 7208.86,3070.92
GND on Bottom Layer "Bottom Layer-No Net" (solid, remove dead copper, pour order 72): 7935.77,3048.39 7935.77,6461.27 7944.05,6469.56 2145.47,6469.56 430.75,6469.56 430.75,3545.42 430.75,3044.25 422.47,3035.97 439.04,3052.54 7952.34,3052.54
N5V on Bottom Layer "Bottom Layer-N5VR" (solid, pour order 64): 775.15,3813.44 775.15,4041.58 618.47,4198.26 536.78,4279.96 536.78,4649.83 569,4682.05 585.48,4698.53 5224.44,4698.53 5237.56,4711.65 5239.04,4713.13 5239.04,4772.46 5239.04,4773.94 5217.78,4795.2 5215.8,4797.19 5023.99,4797.19 536.78,4797.19 439.1,4699.5 435.99,4696.4 435.99,4238.33 668.74,4005.58 668.74,3850.78 668.74,3849.21 699.77,3818.19 715.27,3802.68 753.74,3808.72 775.8,3813.54 774.25,3815.1

## Other copper
Top Layer:
  rectangle net NetC23_1: 1905.05,3712.71 2206.93,3793.05
  rectangle net NetC23_1: 2143.62,3730.98 2445.52,3796.7
  rectangle net 5VO: 3375.65,3738.73 3419.55,4002.12
  rectangle net 5VO: 3288.81,3670.22 3493.47,3749.23
  rectangle net 5VO: 3840.28,3651.48 3879.11,3778.69
  rectangle net 5VO: 3978.2,3639.43 4014.35,3778.69
  rectangle net 5VO: 3289.95,3623.36 4021.05,3686.29
  rectangle net 3V3R: 4894.08,3438.57 4959.69,3671.57
  rectangle net 3V3O: 5279.72,3778.69 5329.26,4015.69
  rectangle net 3V3O: 5773.71,3621.15 5813.07,3781.68
  rectangle net 3V3O: 5908.02,3621.77 5945.49,3766.68
  rectangle net 3V3O: 5195.36,3649.41 5408.39,3727.32
  rectangle net 3V3O: 5192.68,3615.33 5950.08,3682.28
  rectangle net 24V: 6203.69,3716.98 6838.64,3787.53
  rectangle net N5VO: 1136.03,3725.09 1335.64,4000.45
  rectangle net N5VR: 609.34,3354.37 646.24,3888.13
  rectangle net GND: 826.54,3330.57 1338.89,3423.4
  rectangle net 5VR: 2953.48,3396.93 3001.39,3919.67
  rectangle net 5VR: 2948.25,3310.68 3490.16,3477.09
  rectangle net GND: 4074.75,3468.38 4350.06,3561.6
  rectangle net 24V: 4043.39,3720.16 4350.05,3809.89
  rectangle net GND: 5978.4,3463.15 6256.32,3561.6
  rectangle net NetF1_2: 4720.34,3729.74 4950.34,3781.15
  rectangle net 3V3R: 4885,3324.62 5399.93,3516.29
  rectangle net 24V: 5985.37,3716.68 6247.61,3812.51
  rectangle net N5VO: 1133.58,3612.34 1876.06,3684.15
  rectangle net N5VO: 1138.71,3676.45 1329.78,3758.52
  rectangle net N5VO: 1704.22,3650.81 1738.85,3749.55
  rectangle net N5VO: 1838.87,3648.24 1872.21,3736.72

## Silkscreen, mask and mechanical layers (free items; w line width, h text height)
Top Overlay:
  lines w20: 7937.4,4689.44 7937.4,3045 425,3045 425,6469.14 7942.4,6469.14 7942.4,5259.18